# EAGLE board LUZES_18Fv2 (EAGLE 5.06)
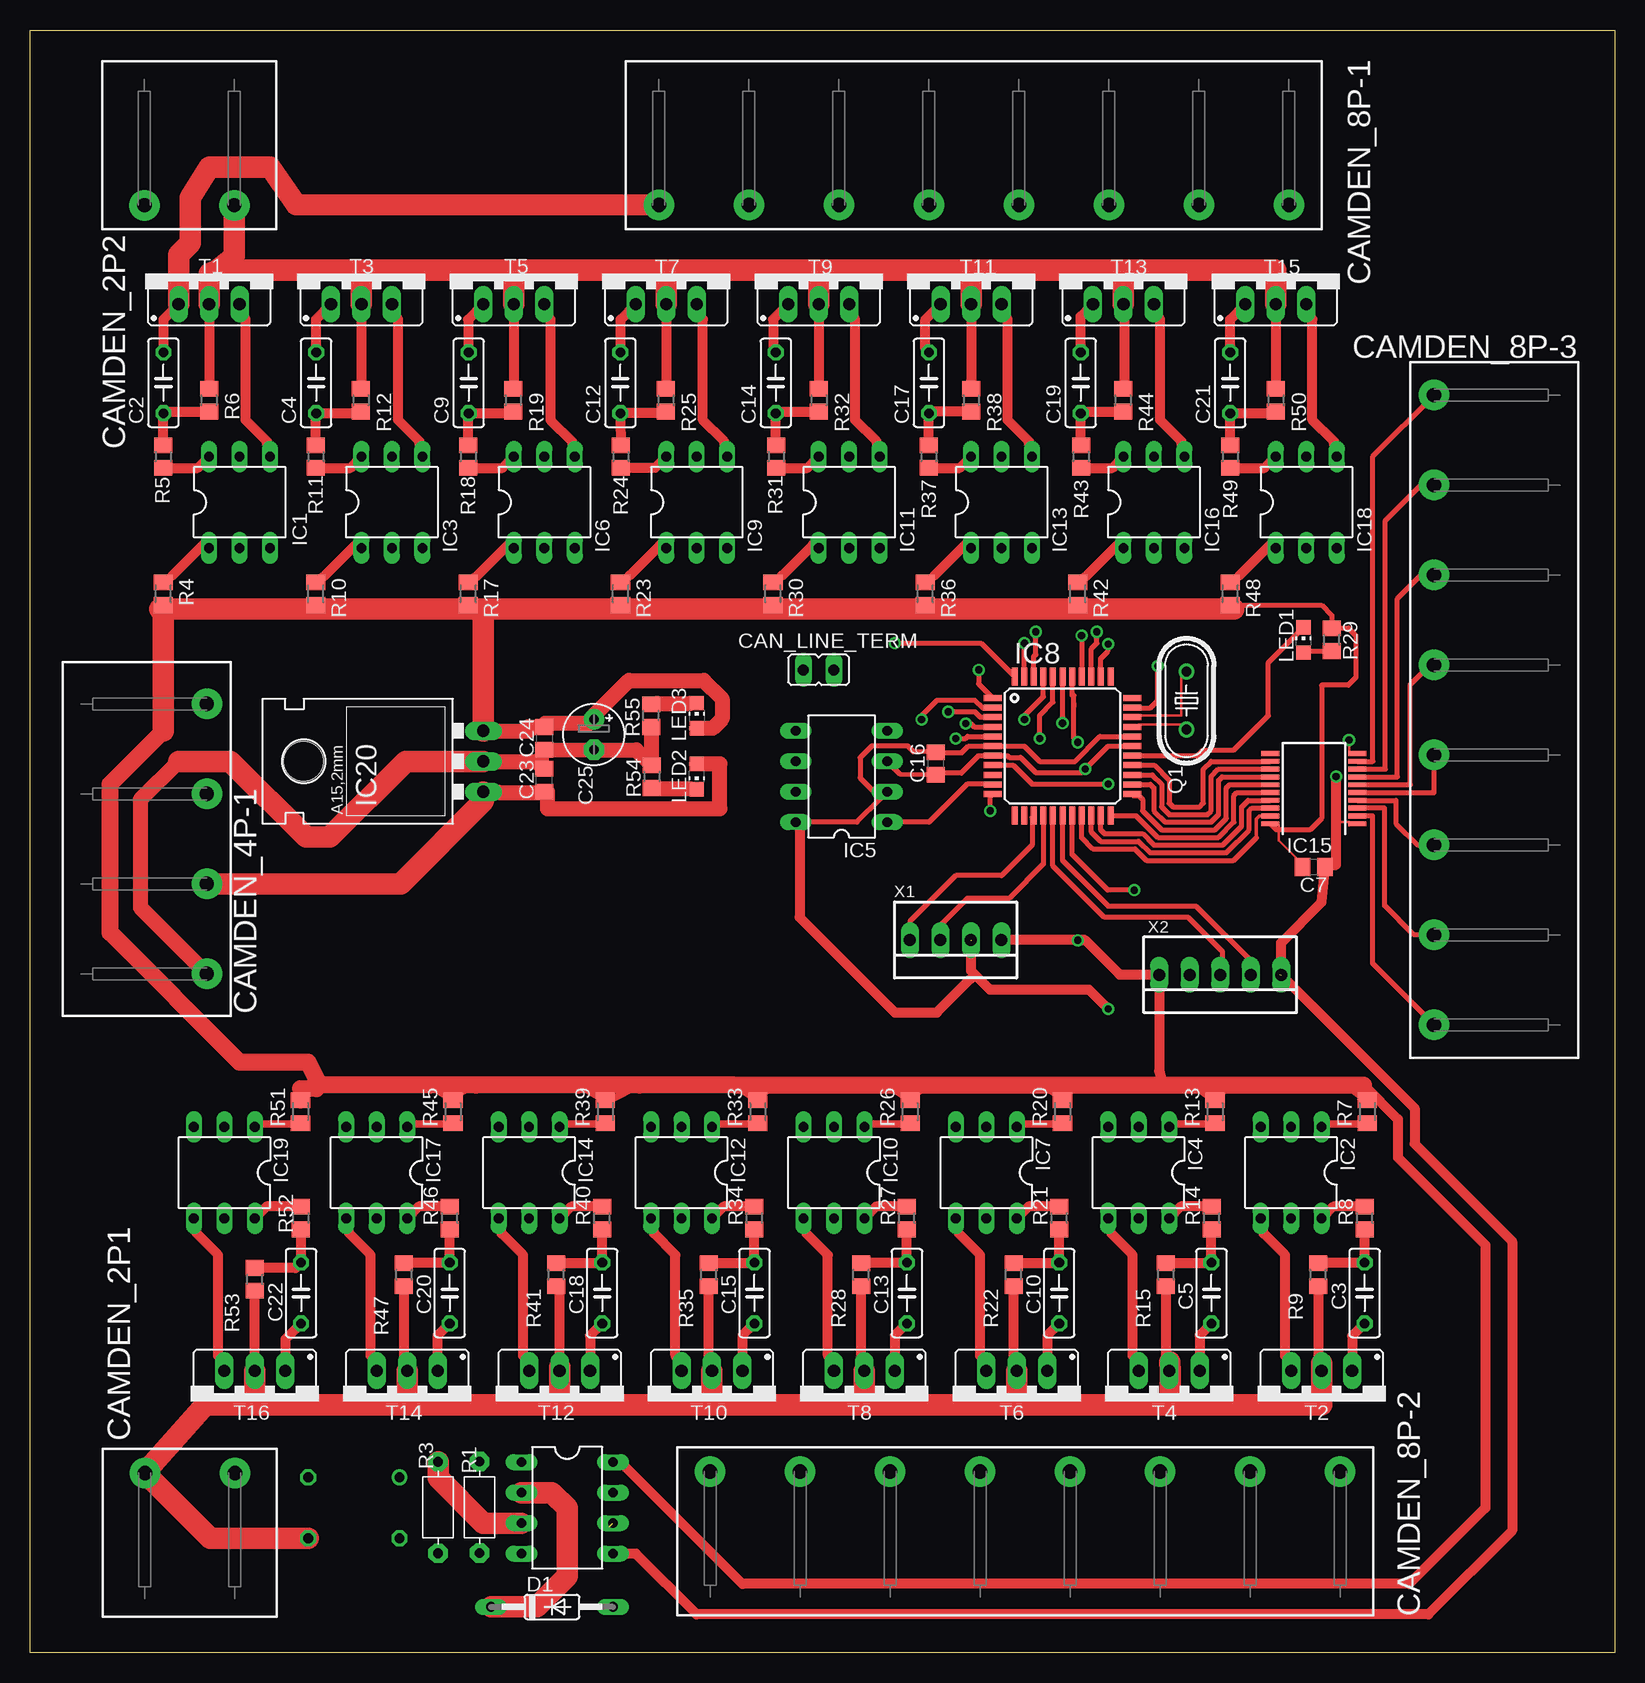
[diagram p0: board, top side]
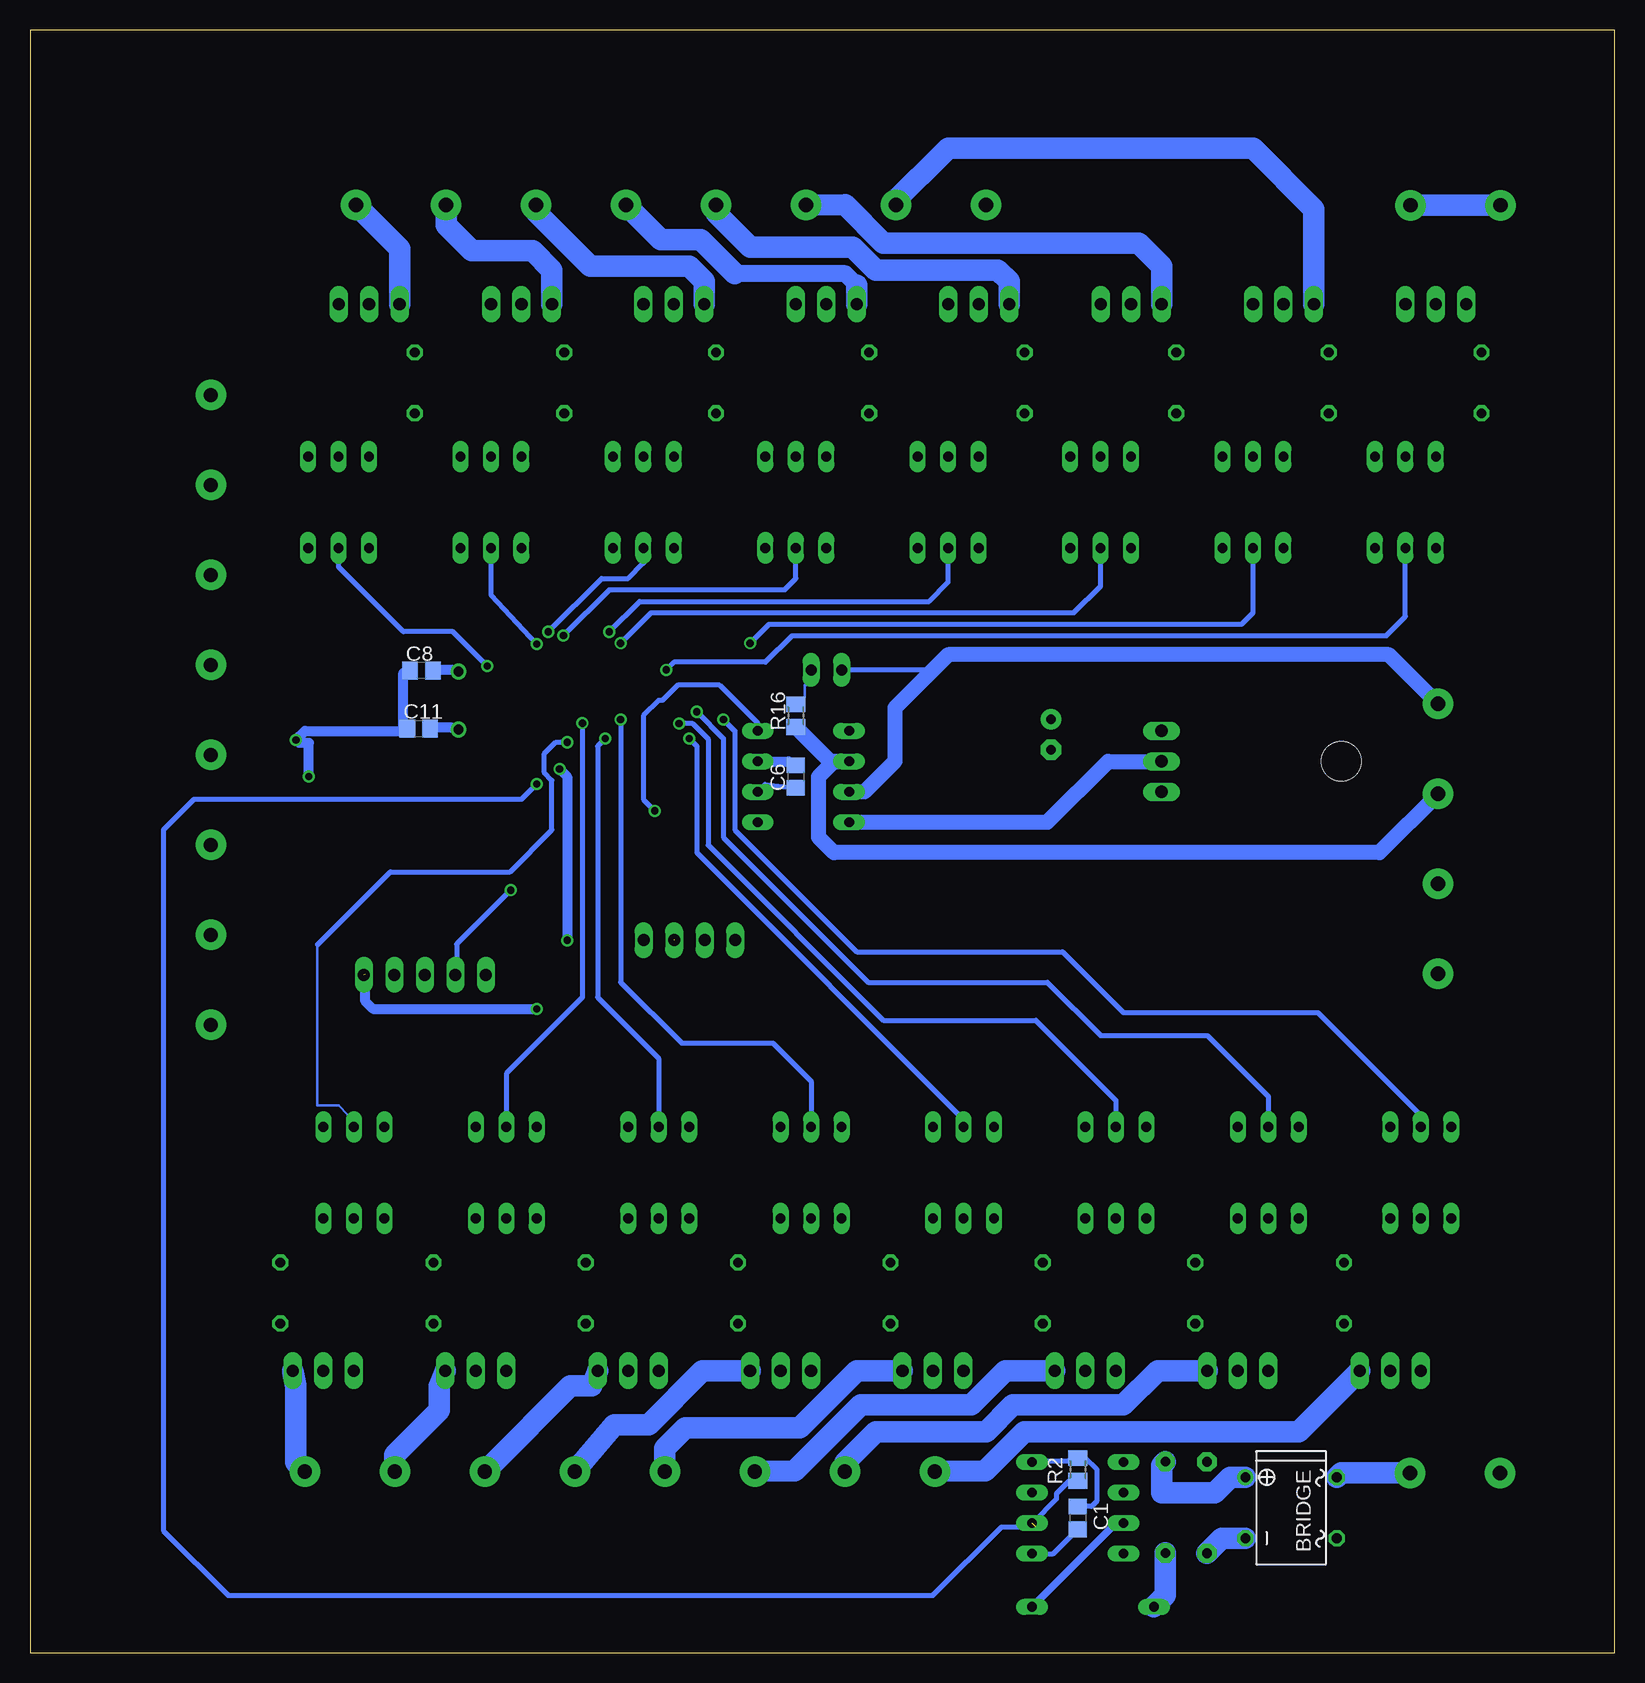
[diagram p1: board, bottom side, seen from below]

Size 132.08 x 135.25 mm. Coordinates in mm from the lower left corner, seen from the top.
Outline: 0,135.25 132.08,135.25 132.08,0 0,0 0,135.25
Copper layers (1*16): Top 0.035mm / dielectric 1.5mm / Bottom 0.035mm
Design rules "8mils": minimum track width 8mil, minimum drill 0.6mm, track to track 8mil, track to pad 8mil, pad to pad 8mil, via to via 8mil, smd to smd 8mil, copper to edge 40mil, drill to drill 10mil, minimum pad ring 10mil, minimum via ring 8mil, stop-mask expansion 0mil, vias tented up to drill 0mil, thermal gap 10mil

## Footprints (pad centres in the part's own frame; a part is rotated, then mirrored left to right if it is on the bottom)
DIL08 = drill 0.813 long: 1 -3.81,-3.81; 2 -1.27,-3.81; 3 1.27,-3.81; 4 3.81,-3.81; 5 3.81,3.81; 6 1.27,3.81; 7 -1.27,3.81; 8 -3.81,3.81
B-DIL = drill 0.813 round: + -2.54,-3.81 | drill 0.813 octagon: - 2.54,-3.81; AC1 2.54,3.81; AC2 -2.54,3.81
C0805 = smd 1.3 x 1.5: 1 -0.95,0; 2 0.95,0
C050-025X075 = drill 0.813 octagon: 1 -2.54,0; 2 2.54,0
E2,5-5 = drill 0.813 pad 1.7 round: + -1.27,0 | drill 0.813 pad 1.7 octagon: - 1.27,0
CTB9550-2 = drill 1.2 pad 2.54 round: P$1 0,0; P$2 7.5,0
CTB9550-4 = drill 1.2 pad 2.54 round: P$1 0,0; P$2 7.5,0; P$3 15,0; P$4 22.5,0
CTB9550-8 = drill 1.2 pad 2.54 round: P$9 0,0; P$10 7.5,0; P$11 15,0; P$12 22.5,0; P$13 30,0; P$14 37.5,0; P$15 45,0; P$16 52.5,0
JP1 = drill 0.914 long: 1 0,-1.27; 2 0,1.27
DO35-10 = drill 0.813 long: A 5.08,0; C -5.08,0
DIL06 = drill 0.813 long: 1 -2.54,-3.81; 2 0,-3.81; 3 2.54,-3.81; 4 2.54,3.81; 5 0,3.81; 6 -2.54,3.81
TQFP44 = smd 1.5 x 0.5: 1 -5.8,4; 2 -5.8,3.2; 3 -5.8,2.4; 4 -5.8,1.6; 5 -5.8,0.8; 6 -5.8,0; 7 -5.8,-0.8; 8 -5.8,-1.6; 9 -5.8,-2.4; 10 -5.8,-3.2; 11 -5.8,-4; 23 5.8,-4; 24 5.8,-3.2; 25 5.8,-2.4; 26 5.8,-1.6; 27 5.8,-0.8; 28 5.8,0; 29 5.8,0.8; 30 5.8,1.6; 31 5.8,2.4; 32 5.8,3.2; 33 5.8,4 | smd 0.5 x 1.5: 12 -4,-5.8; 13 -3.2,-5.8; 14 -2.4,-5.8; 15 -1.6,-5.8; 16 -0.8,-5.8; 17 0,-5.8; 18 0.8,-5.8; 19 1.6,-5.8; 20 2.4,-5.8; 21 3.2,-5.8; 22 4,-5.8; 34 4,5.8; 35 3.2,5.8; 36 2.4,5.8; 37 1.6,5.8; 38 0.8,5.8; 39 0,5.8; 40 -0.8,5.8; 41 -1.6,5.8; 42 -2.4,5.8; 43 -3.2,5.8; 44 -4,5.8
SSOP20 = smd 0.4 x 1.5: 1 -2.925,-3.625; 2 -2.275,-3.625; 3 -1.625,-3.625; 4 -0.975,-3.625; 5 -0.325,-3.625; 6 0.325,-3.625; 7 0.975,-3.625; 8 1.625,-3.625; 9 2.275,-3.625; 10 2.925,-3.625; 11 2.925,3.625; 12 2.275,3.625; 13 1.625,3.625; 14 0.975,3.625; 15 0.325,3.625; 16 -0.325,3.625; 17 -0.975,3.625; 18 -1.625,3.625; 19 -2.275,3.625; 20 -2.925,3.625
78XXL = drill 1.016 long: GND 0,-3.81; IN -2.54,-3.81; OUT 2.54,-3.81 | hole 3.302: 0,11.176
CHIP-LED0805 = smd 1.2 x 1.2: A 0,-1.05; C 0,1.05
HC49U-V = drill 0.813 round: 1 -2.413,0; 2 2.413,0
R-7,5 = drill 0.813 pad 1.6 octagon: 1 -3.81,0; 2 3.81,0
M0805 = smd 1.3 x 1.6: 1 -0.95,0; 2 0.95,0
R0805 = smd 1.3 x 1.5: 1 -0.95,0; 2 0.95,0
TO220DS = drill 1.016 long: A1 -2.54,-2.54; A2 0,-2.54; G 2.54,-2.54
22-23-2041 = drill 1 long: 1 -3.81,0; 2 -1.27,0; 3 1.27,0; 4 3.81,0
22-23-2051 = drill 1 long: 1 -5.08,0; 2 -2.54,0; 3 0,0; 4 2.54,0; 5 5.08,0

## Placement (x,y rotation side)
1  6N138  [DIL08]  44.77,12.06 270 top
BRIDGE  [B-DIL]  26.99,12.06 270 bottom
C1  100n  [C0805]  44.77,11.23 270 bottom
C2  0.05u  [C050-025X075]  11.12,105.84 90 top
C3  0.05u  [C050-025X075]  111.22,29.97 270 top
C4  0.05u  [C050-025X075]  23.85,105.84 90 top
C5  0.05u  [C050-025X075]  98.45,29.97 270 top
C6  100n  [C0805]  68.26,73.02 270 bottom
C7  100n  [C0805]  106.98,65.5 0 top
C8  22pF  [C0805]  99.46,81.85 180 bottom
C9  0.05u  [C050-025X075]  36.56,105.84 90 top
C10  0.05u  [C050-025X075]  85.77,29.97 270 top
C11  22pF  [C0805]  99.69,77.02 0 bottom
C12  0.05u  [C050-025X075]  49.2,105.84 90 top
C13  0.05u  [C050-025X075]  73.08,29.97 270 top
C14  0.05u  [C050-025X075]  62.15,105.84 90 top
C15  0.05u  [C050-025X075]  60.37,29.97 270 top
C16  100n  [C0805]  75.5,74.11 90 top
C17  0.05u  [C050-025X075]  74.92,105.84 90 top
C18  0.05u  [C050-025X075]  47.68,29.97 270 top
C19  0.05u  [C050-025X075]  87.56,105.84 90 top
C20  0.05u  [C050-025X075]  34.97,29.97 270 top
C21  0.05u  [C050-025X075]  100.02,105.84 90 top
C22  0.05u  [C050-025X075]  22.58,29.97 270 top
C23  100n  [C0805]  42.86,72.71 90 top
C24  100n  [C0805]  42.86,76.2 270 top
C25  47u  [E2,5-5]  46.99,76.52 270 top
CAMDEN_2P1  [CTB9550-2]  17.08,14.97 180 top
CAMDEN_2P2  [CTB9550-2]  9.53,120.65 0 top
CAMDEN_4P-1  [CTB9550-4]  14.73,56.58 90 top
CAMDEN_8P-1  [CTB9550-8]  52.4,120.66 0 top
CAMDEN_8P-2  [CTB9550-8]  109.18,15.1 180 top
CAMDEN_8P-3  [CTB9550-8]  117.01,104.82 270 top
CAN_LINE_TERM  [JP1]  65.72,81.92 270 top
D1  1N4148  [DO35-10]  43.5,3.81 0 top
IC1  MOC3022  [DIL06]  17.46,95.89 0 top
IC2  MOC3022  [DIL06]  105.09,40.01 180 top
IC3  MOC3022  [DIL06]  30.16,95.89 0 top
IC4  MOC3022  [DIL06]  92.39,40.01 180 top
IC5  MCP2551  [DIL08]  67.63,73.02 90 top
IC6  MOC3022  [DIL06]  42.86,95.89 0 top
IC7  MOC3022  [DIL06]  79.69,40.01 180 top
IC8  PIC18F4682  [TQFP44]  86.04,75.57 0 top
IC9  MOC3022  [DIL06]  55.56,95.89 0 top
IC10  MOC3022  [DIL06]  66.99,40.01 180 top
IC11  MOC3022  [DIL06]  68.26,95.89 0 top
IC12  MOC3022  [DIL06]  54.29,40.01 180 top
IC13  MOC3022  [DIL06]  80.96,95.89 0 top
IC14  MOC3022  [DIL06]  41.59,40.01 180 top
IC15  MAX6818  [SSOP20]  107,72.01 90 top
IC16  MOC3022  [DIL06]  93.66,95.89 0 top
IC17  MOC3022  [DIL06]  28.89,40.01 180 top
IC18  MOC3022  [DIL06]  106.36,95.89 0 top
IC19  MOC3022  [DIL06]  16.19,40.01 180 top
IC20  [78XXL]  33.97,74.3 90 top
LED1  [CHIP-LED0805]  106.11,84.41 0 top
LED2  [CHIP-LED0805]  55.56,73.02 180 top
LED3  [CHIP-LED0805]  55.56,78.11 0 top
Q1  10MHz  [HC49U-V]  96.37,79.35 90 top
R1  20K  [R-7,5]  37.47,12.11 270 top
R2  2K21  [M0805]  44.77,15.27 90 bottom
R3  20K  [R-7,5]  34.01,12.09 90 top
R4  330  [M0805]  11.11,88.27 270 top
R5  360  [R0805]  11.11,99.7 270 top
R6  470  [R0805]  14.92,104.39 270 top
R7  330  [M0805]  111.44,45.08 90 top
R8  360  [R0805]  111.22,36.23 90 top
R9  470  [R0805]  107.36,31.5 90 top
R10  330  [M0805]  23.81,88.27 270 top
R11  360  [R0805]  23.81,99.7 270 top
R12  470  [R0805]  27.58,104.39 270 top
R13  330  [M0805]  98.74,45.08 90 top
R14  360  [R0805]  98.47,36.23 90 top
R15  470  [R0805]  94.66,31.5 90 top
R16  120  [M0805]  68.26,78.11 90 bottom
R17  330  [M0805]  36.51,88.27 270 top
R18  360  [R0805]  36.51,99.7 270 top
R19  470  [R0805]  40.28,104.39 270 top
R20  330  [M0805]  86.04,45.08 90 top
R21  360  [R0805]  85.77,36.23 90 top
R22  470  [R0805]  81.96,31.5 90 top
R23  330  [M0805]  49.21,88.27 270 top
R24  360  [R0805]  49.24,99.7 270 top
R25  470  [R0805]  52.98,104.39 270 top
R26  330  [M0805]  73.34,45.08 90 top
R27  360  [R0805]  73.07,36.23 90 top
R28  470  [R0805]  69.26,31.5 90 top
R29  560  [R0805]  108.49,84.43 90 top
R30  330  [M0805]  61.91,88.27 270 top
R31  360  [R0805]  62.19,99.7 270 top
R32  470  [R0805]  65.75,104.39 270 top
R33  330  [M0805]  60.64,45.08 90 top
R34  360  [R0805]  60.37,36.23 90 top
R35  470  [R0805]  56.56,31.5 90 top
R36  330  [M0805]  74.61,88.27 270 top
R37  360  [R0805]  74.89,99.7 270 top
R38  470  [R0805]  78.45,104.39 270 top
R39  330  [M0805]  47.94,45.08 90 top
R40  360  [R0805]  47.67,36.23 90 top
R41  470  [R0805]  43.86,31.5 90 top
R42  330  [M0805]  87.31,88.27 270 top
R43  360  [R0805]  87.59,99.7 270 top
R44  470  [R0805]  91.08,104.39 270 top
R45  330  [M0805]  35.24,45.08 90 top
R46  360  [R0805]  34.97,36.23 90 top
R47  470  [R0805]  31.16,31.5 90 top
R48  330  [M0805]  100.01,88.27 270 top
R49  360  [R0805]  100.01,99.7 270 top
R50  470  [R0805]  103.82,104.39 270 top
R51  330  [M0805]  22.54,45.08 90 top
R52  360  [R0805]  22.58,36.23 90 top
R53  470  [R0805]  18.73,31.11 90 top
R54  560  [R0805]  51.81,73.02 270 top
R55  560  [R0805]  51.75,78.11 90 top
T1  BTA216  [TO220DS]  14.92,114.93 0 top
T2  BTA216  [TO220DS]  107.63,20.95 180 top
T3  BTA216  [TO220DS]  27.62,114.93 0 top
T4  BTA216  [TO220DS]  94.93,20.95 180 top
T5  BTA216  [TO220DS]  40.32,114.93 0 top
T6  BTA216  [TO220DS]  82.23,20.95 180 top
T7  BTA216  [TO220DS]  53.02,114.93 0 top
T8  BTA216  [TO220DS]  69.53,20.95 180 top
T9  BTA216  [TO220DS]  65.72,114.93 0 top
T10  BTA216  [TO220DS]  56.83,20.95 180 top
T11  BTA216  [TO220DS]  78.42,114.93 0 top
T12  BTA216  [TO220DS]  44.13,20.95 180 top
T13  BTA216  [TO220DS]  91.12,114.93 0 top
T14  BTA216  [TO220DS]  31.43,20.95 180 top
T15  BTA216  [TO220DS]  103.82,114.93 0 top
T16  BTA216  [TO220DS]  18.73,20.95 180 top
X1  22-23-2041  [22-23-2041]  77.14,59.4 180 top
X2  22-23-2051  [22-23-2051]  99.17,56.5 180 top

## Library data of the parts
1 = optocoupler
BRIDGE = rectifier
C1-C25 R2 R4-R55 = rcl
CAMDEN_2P1 CAMDEN_2P2 CAMDEN_4P-1 CAMDEN_8P-1-CAMDEN_8P-3 = mycomponents
CAN_LINE_TERM = jumper
D1 = diode
IC1-IC4 IC6 IC7 IC9-IC14 IC16-IC19 = ic-package
IC5 = micro-philips
IC8 = microchip
IC15 = maxim
IC20 = v-reg
LED1-LED3 = led
Q1 = crystal
R1 R3 = discrete
T1-T16 = triac
X1 X2 = con-molex

## Nets
+5V: 1.8 C1.1 C6.1 C7.1 C16.1 C24.1 C25.+ IC5.3 IC8.7 IC8.28 IC15.20 IC20.OUT LED3.A R2.2 R4.2 R7.2 R10.2 R13.2 R17.2 R20.2 R23.2 R26.2 R29.2 R30.2 R33.2 R36.2 R39.2 R42.2 R45.2 R48.2 R51.2 X1.1 X2.5
+18V: 1.6 IC8.8 R2.1
CAN_H: CAMDEN_4P-1.P$4 CAN_LINE_TERM.1 IC5.7
CAN_L: CAMDEN_4P-1.P$3 IC5.6 R16.1
CAN_RX(TTL): IC5.4 IC8.11
CAN_TX(TTL): IC5.1 IC8.10
GND: 1.5 C1.2 C6.2 C7.2 C8.2 C11.1 C16.2 C23.2 C24.2 C25.- CAMDEN_4P-1.P$1 IC5.2 IC5.8 IC8.6 IC8.29 IC15.1 IC15.10 IC20.GND R54.1 R55.1 X1.2 X2.1
INPUT1: IC8.19 IC15.19
INPUT2: IC8.20 IC15.18
INPUT3: IC8.21 IC15.17
INPUT4: IC8.22 IC15.16
INPUT5: IC8.23 IC15.15
INPUT6: IC8.24 IC15.14
INPUT7: IC8.25 IC15.13
INPUT8: IC8.26 IC15.12
MCLR: IC8.18 X2.4
N$1: C8.1 IC8.31 Q1.2
N$2: C11.2 IC8.30 Q1.1
N$3: BRIDGE.AC1 CAMDEN_2P1.P$2 R9.1 R15.1 R22.1 R28.1 R35.1 R41.1 R47.1 R53.1 T2.A2 T4.A2 T6.A2 T8.A2 T10.A2 T12.A2 T14.A2 T16.A2
N$4: BRIDGE.AC2 CAMDEN_2P1.P$1
N$5: BRIDGE.+ R1.1
N$6: CAMDEN_8P-3.P$16 IC15.2
N$7: CAMDEN_8P-3.P$15 IC15.3
N$8: CAMDEN_8P-3.P$9 IC15.9
N$9: CAMDEN_8P-3.P$10 IC15.8
N$10: CAMDEN_8P-3.P$11 IC15.7
N$11: CAMDEN_8P-3.P$14 IC15.4
N$12: CAMDEN_8P-3.P$13 IC15.5
N$13: CAMDEN_8P-3.P$12 IC15.6
N$16: IC3.6 R11.2
N$17: IC6.6 R18.2
N$18: IC9.6 R24.2
N$20: IC2.6 R8.2
N$25: IC4.6 R14.2
N$27: IC11.6 R31.2
N$29: IC13.6 R37.2
N$30: IC16.6 R43.2
N$33: IC17.6 R46.2
N$34: IC14.6 R40.2
N$35: IC12.6 R34.2
N$36: IC10.6 R27.2
N$37: IC7.6 R21.2
N$38: LED1.A R29.1
N$39: IC8.27 LED1.C
N$40: IC18.6 R49.2
N$41: IC19.6 R52.2
N$46: CAMDEN_2P2.P$1 CAMDEN_2P2.P$2 R6.1 R12.1 R19.1 R25.1 R32.1 R38.1 R44.1 R50.1 T1.A2 T3.A2 T5.A2 T7.A2 T9.A2 T11.A2 T13.A2 T15.A2
N$111: C23.1 CAMDEN_4P-1.P$2 IC20.IN LED2.A
N$112: LED2.C R54.2
N$115: LED3.C R55.2
N$116: 1.2 D1.C R1.2
N$117: BRIDGE.- R3.1
N$118: 1.3 D1.A R3.2
N$119: IC1.1 R4.1
N$120: IC1.6 R5.2
N$121: C2.1 R5.1 R6.2
N$123: IC1.4 T1.G
N$125: IC3.1 R10.1
N$127: C4.1 R11.1 R12.2
N$129: IC3.4 T3.G
N$131: IC6.1 R17.1
N$133: C9.1 R18.1 R19.2
N$135: IC6.4 T5.G
N$137: IC9.1 R23.1
N$139: C12.1 R24.1 R25.2
N$141: IC9.4 T7.G
N$143: IC11.1 R30.1
N$145: C14.1 R31.1 R32.2
N$147: IC11.4 T9.G
N$149: IC13.1 R36.1
N$151: C17.1 R37.1 R38.2
N$153: IC13.4 T11.G
N$155: IC16.1 R42.1
N$157: C19.1 R43.1 R44.2
N$159: IC16.4 T13.G
N$161: IC18.1 R48.1
N$163: C21.1 R49.1 R50.2
N$165: IC18.4 T15.G
N$168: IC2.1 R7.1
N$170: C3.1 R8.1 R9.2
N$172: IC2.4 T2.G
N$174: IC4.1 R13.1
N$176: C5.1 R14.1 R15.2
N$178: IC4.4 T4.G
N$180: IC7.1 R20.1
N$182: C10.1 R21.1 R22.2
N$184: IC7.4 T6.G
N$186: IC10.1 R26.1
N$188: C13.1 R27.1 R28.2
N$190: IC10.4 T8.G
N$192: IC12.1 R33.1
N$194: C15.1 R34.1 R35.2
N$196: IC12.4 T10.G
N$198: IC14.1 R39.1
N$200: C18.1 R40.1 R41.2
N$202: IC14.4 T12.G
N$204: IC17.1 R45.1
N$206: C20.1 R46.1 R47.2
N$208: IC17.4 T14.G
N$210: IC19.1 R51.1
N$212: C22.1 R52.1 R53.2
N$214: IC19.4 T16.G
N$217: CAN_LINE_TERM.2 R16.2
OUT1: IC8.32 IC18.2
OUT2: IC8.35 IC16.2
OUT3: IC8.36 IC13.2
OUT4: IC8.37 IC11.2
OUT5: IC8.42 IC9.2
OUT6: IC6.2 IC8.43
OUT7: IC3.2 IC8.44
OUT8: IC1.2 IC8.1
OUT9: IC2.2 IC8.38
OUT10: IC4.2 IC8.39
OUT11: IC7.2 IC8.40
OUT12: IC8.41 IC10.2
OUT13: IC8.5 IC12.2
OUT14: IC8.4 IC14.2
OUT15: IC8.3 IC17.2
OUT16: IC8.2 IC19.2
OUTPUT1: C22.2 CAMDEN_8P-2.P$16 T16.A1
OUTPUT2: C20.2 CAMDEN_8P-2.P$15 T14.A1
OUTPUT3: C18.2 CAMDEN_8P-2.P$14 T12.A1
OUTPUT4: C15.2 CAMDEN_8P-2.P$13 T10.A1
OUTPUT5: C13.2 CAMDEN_8P-2.P$12 T8.A1
OUTPUT6: C10.2 CAMDEN_8P-2.P$11 T6.A1
OUTPUT7: C5.2 CAMDEN_8P-2.P$10 T4.A1
OUTPUT8: C3.2 CAMDEN_8P-2.P$9 T2.A1
OUTPUT9: C2.2 CAMDEN_8P-1.P$9 T1.A1
OUTPUT10: C4.2 CAMDEN_8P-1.P$10 T3.A1
OUTPUT11: C9.2 CAMDEN_8P-1.P$11 T5.A1
OUTPUT12: C12.2 CAMDEN_8P-1.P$12 T7.A1
OUTPUT13: C14.2 CAMDEN_8P-1.P$13 T9.A1
OUTPUT14: C17.2 CAMDEN_8P-1.P$14 T11.A1
OUTPUT15: C19.2 CAMDEN_8P-1.P$15 T13.A1
OUTPUT16: C21.2 CAMDEN_8P-1.P$16 T15.A1
PGC: IC8.16 X2.3
PGD: IC8.17 X2.2
RS232_RX: IC8.14 X1.4
RS232_TX: IC8.15 X1.3

## Tracks (layer width: path | path; a pad name or v marks a point on that pad's centre or on a via)
+5V  (via drill 0.6)
  Top 0.203: 89.71,86.85 88.07,87.76 R42.2 | 98.4,87.32 98.91,87.34 R48.2 99.5,86.74 | C7.1 106.11,65.66 104.08,67.69 104.08,68.96 IC15.20 | R7.2 110.68,46.1 | 73.3,87.28 73.85,87.76 R36.2
  Top 0.406: X2.5 | R48.2 107.63,87.31 108.49,86.46 R29.2 108.51,85.41 109.85,85.41 110.49,84.77 110.49,81.28 109.85,80.64 107.63,80.64 107.63,69.53 106.68,68.58 103.88,68.58 IC15.20 | IC8.28 89.85,75.57 v87.95,73.66 87.63,73.34 83.82,73.34 82.55,74.61 81.6,74.61 81.45,74.77 IC8.7 79.08,74.77 77.62,73.31 75.96,73.31 C16.1 72.53,73.2 IC5.3 | R10.2 R4.2 11.11,86.99 | R17.2 R23.2 R30.2 R36.2 | 46.67,77.47 C25.+ 46.99,78.11 | 49.09,16 48.7,16 1.8
  Top 0.61: 24.13,47.31 23.88,47.01 | 33.34,47.31 R45.2 35.24,46.36 37.15,47.31 | 45.72,47.31 R39.2 48.26,46.04 50.8,47.31 | 58.73,47.31 R33.2 60.64,46.36 62.55,47.62 71.12,47.62 R26.2 73.34,46.36 75.57,47.62 84.13,47.62 R20.2 86.04,46.36 87.95,47.62 94.3,47.62 96.52,47.62 R13.2 98.74,46.36 100.65,47.62 109.22,47.62 R7.2 | 41.59,76.83 41.51,77.16
  Top 0.813: X2.5 94.09,48.46 94.3,47.62 | 87.92,59.4 X1.1 | 87.92,59.4 90.81,56.52 X2.5 | R23.2 49.85,87.32 49.85,86.99 | 89.71,86.85 88.15,86.85 88.26,86.99 | 100.33,86.99 99.5,86.99 99.5,86.74 | 87.92,59.4 87.31,59.4 v87.31,59.37 | 49.09,16 59.37,5.72 114.93,5.72 121.28,12.06 121.28,33.97 113.98,41.27 113.98,44.45 111.12,47.31
  Top 1.27: 41.51,77.16 C24.1 42.91,77.47 43.72,77.47 46.67,77.47 | IC20.OUT 41.59,76.83 | 46.99,78.11 49.91,81.03 56.15,81.03 57.67,79.51 57.67,77.83 56.88,77.04 55.58,77.04 LED3.A
  Top 1.422: R51.2 22.54,46.99 23.88,47.01 | 11.11,76.83 6.67,72.39 6.67,60.01 17.46,49.21 23.18,49.21 24.13,47.31 33.34,47.31 37.15,47.31 45.72,47.31 50.8,47.31 58.73,47.31 111.12,47.31
  Top 1.778: 11.11,86.99 37.6,86.99 | 37.6,86.99 49.85,86.99 88.26,86.99 100.33,86.99 | 11.11,86.99 10.79,86.99 | 11.11,76.83 11.11,86.99 | IC20.OUT 37.78,86.81 37.6,86.99
  Bottom 0.203: 45.53,16 R2.2
  Bottom 0.406: 45.53,16 48.45,16 1.8 | C1.1 43.61,12.18 43.19,12.59 43.19,15.3 44.13,16.24 44.75,16.24 R2.2
  Bottom 0.813: IC5.3 68.88,74.3 C6.1 | v87.31,59.37 87.31,73.02 v87.95,73.66
+18V  (via drill 0.6)  (1 unrouted)
  Top 0.406: IC8.8 81.93,73.96 83.5,72.39 v89.85,72.39
  Bottom 0.406: 47.94,10.8 1.6 46.53,12.85 46.53,13.26 45.47,14.32 R2.1 | 48.26,10.48 51.12,10.48 56.83,4.76 115.57,4.76 120.97,10.16 120.97,68.58 118.43,71.12 91.12,71.12 v89.85,72.39
CAN_H
  Bottom 0.406: CAN_LINE_TERM.1 57.15,81.92 56.99,81.76
  Bottom 1.27: IC5.7 62.55,71.76 60.01,74.3 60.01,78.74 56.99,81.76 55.56,83.18 18.84,83.18 CAMDEN_4P-1.P$4
CAN_L
  Bottom 1.27: R16.1 65.4,74.3 IC5.6 65.09,74.3 66.36,73.02 66.36,67.95 65.09,66.67 19.64,66.67 CAMDEN_4P-1.P$3
CAN_RX(TTL)  (via drill 0.6)
  Top 0.406: v80.01,70.17 80.01,71.33 IC8.11
  Bottom 0.406: IC5.4 71.44,77.47 74.61,80.64 78.1,80.64 79.37,79.37 79.69,79.37 80.96,78.11 80.96,71.12 v80.01,70.17
CAN_TX(TTL)
  Top 0.406: IC5.1 74.93,69.21 78.1,72.39 80.22,72.39 IC8.10
GND  (via drill 0.6)  (2 unrouted)
  Top 0.203: C7.2 107.89,65.66 | 109.92,68.96 IC15.1 109.92,69.21 108.84,69.21 | v109.92,76.07 109.92,75.06 IC15.10
  Top 0.406: 70.89,71.2 68.9,69.21 IC5.8 64.13,68.9 | 70.89,71.2 IC5.2 | 78.41,56.18 X1.2 | IC8.29 89.15,76.36 87.08,74.3 84.14,74.3 82.87,75.57 IC8.6 78.19,75.57 77.62,74.99 75.96,74.99 C16.2 73.6,75.11 73.13,75.57 70.16,75.57 69.18,74.6 69.18,72.91 70.89,71.2 | 46.72,75.27 C25.- | 51.81,77.1 R55.1
  Top 0.813: v108.84,73.02 108.84,69.21 108.84,65.66 107.89,65.66 | C24.2 C23.2 | C7.2 107.63,62.55 104.25,59.17 X2.1 115.39,45.37 115.39,42.41 123.51,34.29 123.51,10.16 116.52,3.17 55.56,3.17 50.48,8.25 1.5 | 78.41,56.18 75.57,53.34 72.07,53.34 64.13,61.28 64.13,68.9 | 78.42,59.37 78.42,56.83 80.01,55.24 88.26,55.24 v89.85,53.66
  Top 1.27: 12.38,74.3 9.21,71.12 9.21,62.11 CAMDEN_4P-1.P$1 | C23.2 42.23,74.3 IC20.GND | C24.2 46.72,75.27 | C25.- 50.53,75.25 R54.1 51.81,77.1
  Top 1.778: IC20.GND 31.3,74.3 24.98,67.98 23.01,67.98 16.7,74.29 12.39,74.29 12.38,74.3
  Bottom 0.203: 100.52,81.66 C8.2 | 100.77,76.83 C11.1 | 109.66,75.82 v109.92,76.07
  Bottom 0.406: C6.2 70.82,72.37 IC5.2 | 1.5 46.79,8.25 C1.2
  Bottom 0.813: 100.96,76.83 100.77,76.83 | v109.92,76.07 109.16,76.83 100.96,76.83 | v108.84,73.02 108.84,75.82 109.66,75.82 | v89.85,53.66 103.51,53.66 104.14,54.29 104.14,56.52 | 100.52,81.66 100.96,81.66 100.96,76.83
  Bottom 1.27: IC5.8 47.31,69.21 42.23,74.3 IC20.GND
INPUT1
  Top 0.305: IC15.19 102.44,69.74 102.2,69.5 102.2,67.91
  Top 0.406: IC8.19 87.64,67.93 88.58,66.99 92.07,66.99 93.03,66.04 100.33,66.04 102.2,67.91
INPUT2
  Top 0.406: IC15.18 101.82,70.39 101.6,70.17 101.6,68.58 99.7,66.67 93.34,66.67 92.39,67.63 89.22,67.63 88.44,68.4 IC8.20
INPUT3
  Top 0.406: IC8.21 89.24,68.55 89.54,68.26 92.71,68.26 93.66,67.31 99.38,67.31 100.96,68.9 100.96,70.48 101.52,71.04 IC15.17
INPUT4
  Top 0.406: IC8.22 92.16,69.77 93.98,67.95 99.06,67.95 100.33,69.21 100.33,71.44 100.58,71.69 IC15.16
INPUT5
  Top 0.406: IC15.15 99.96,72.34 99.7,72.07 99.7,69.53 98.74,68.58 94.3,68.58 92.71,70.17 92.71,71.12 92.39,71.44 91.97,71.44 IC8.23
INPUT6
  Top 0.406: IC8.24 93.37,72.36 93.66,72.07 93.66,70.17 94.62,69.21 98.43,69.21 99.06,69.85 99.06,72.71 99.34,72.99 IC15.14
INPUT7
  Top 0.406: IC8.25 93.52,73.17 94.3,72.39 94.3,70.48 94.93,69.85 98.11,69.85 98.43,70.17 98.43,73.02 99.04,73.64 IC15.13
INPUT8
  Top 0.406: IC8.26 93.68,73.96 94.93,72.71 94.93,70.8 95.25,70.48 97.47,70.48 97.79,70.8 97.79,73.66 98.43,74.3 98.43,74.29 IC15.12
MCLR  (via drill 0.6)
  Top 0.406: IC8.18 86.84,66.51 89.8,63.55 v92.01,63.55
  Bottom 0.406: X2.4 96.52,56.62 96.52,59.05 92.39,63.18 92.38,63.18 v92.01,63.55
N$1
  Top 0.203: IC8.31 92.39,78.11 95.95,78.11 95.95,81.41 Q1.2
  Bottom 0.203: 98.49,81.92 C8.1
  Bottom 0.813: 98.49,81.92 96.96,81.92 Q1.2
N$2
  Top 0.203: IC8.30 92.39,77.34 95.95,77.34 Q1.1
  Bottom 0.203: 98.74,77.09 C11.2
  Bottom 0.813: 98.74,77.09 96.96,77.09 Q1.1
N$3
  Top 0.203: 107.38,30.1 R9.1 | 107.38,24.77 T2.A2 | 94.68,30.1 R15.1 | T4.A2 94.68,24.77 | 81.98,30.1 R22.1 | 69.28,30.1 R28.1 | 56.58,30.1 R35.1 | 31.18,30.1 R47.1
  Top 0.406: 107.38,24.77 107.38,23.43 107.63,23.18 | 95.03,23.5 T4.A2 | 94.68,24.77 94.68,22.16 94.93,21.91 | 44.13,30.28 R41.1 | T12.A2 44.13,21.27 44.45,20.64 | T10.A2 56.58,23.75
  Top 0.813: T16.A2 R53.1 | 107.38,24.77 107.38,30.1 | 94.68,24.77 94.68,30.1 | 81.98,30.1 81.98,24.77 T6.A2 | 69.28,30.1 69.28,24.77 T8.A2 | 56.58,30.1 56.58,24.77 56.58,23.75 | 31.18,30.1 31.18,24.77 T14.A2 | 44.13,23.81 44.13,30.28
  Top 1.778: 18.73,20.64 31.43,20.64 | 31.43,20.64 44.13,20.64 | 44.13,20.64 44.45,20.64 56.83,20.64 | 56.83,20.64 69.53,20.64 | 69.53,20.64 82.31,20.64 | 82.31,20.64 95.03,20.64 | 95.03,20.64 107.63,20.64 107.63,23.18 107.63,24.13 | 95.03,20.64 95.03,23.5 95,24.24 | 69.53,20.64 T8.A2 | 44.13,20.64 T12.A2 44.13,23.81 | 31.43,20.64 T14.A2 | 18.73,20.64 T16.A2 | 18.73,20.64 14.62,20.64 CAMDEN_2P1.P$2 15.02,9.53 BRIDGE.AC1 | T10.A2 56.83,20.64 | T6.A2 82.23,20.72 82.31,20.64
N$4
  Bottom 1.778: CAMDEN_2P1.P$1 22.82,14.97 BRIDGE.AC2
N$5
  Bottom 1.778: BRIDGE.+ 32.07,14.61 33.34,13.33 37.78,13.33 37.78,15.6 R1.1
N$6
  Top 0.406: IC15.2 111.88,69.74 111.88,57.46 CAMDEN_8P-3.P$16
N$7
  Top 0.406: IC15.3 112.88,70.39 112.88,62.27 115.33,59.82 CAMDEN_8P-3.P$15
N$8
  Top 0.406: IC15.9 111.91,74.29 111.91,99.72 CAMDEN_8P-3.P$9
N$9
  Top 0.406: IC15.8 112.94,73.64 112.94,94.37 115.89,97.32 CAMDEN_8P-3.P$10
N$10
  Top 0.406: IC15.7 113.95,72.99 113.95,87.85 115.92,89.82 CAMDEN_8P-3.P$11
N$11
  Top 0.406: IC15.4 113.83,71.04 113.83,69.12 115.63,67.32 CAMDEN_8P-3.P$14
N$12
  Top 0.406: IC15.5 117.01,71.69 CAMDEN_8P-3.P$13
N$13
  Top 0.406: IC15.6 115.03,72.34 115.03,80.7 116.65,82.32 CAMDEN_8P-3.P$12
N$16
  Top 0.813: IC3.6 26.67,98.74 R11.2
N$17
  Top 0.813: IC6.6 39.37,98.74 R18.2
N$18
  Top 0.813: IC9.6 52.07,98.74 R24.2
N$20
  Top 0.813: R8.2 108.61,37.17 IC2.6
N$25
  Top 0.813: R14.2 95.91,37.17 IC4.6
N$27
  Top 0.813: IC11.6 64.77,98.74 R31.2
N$29
  Top 0.813: IC13.6 77.47,98.74 R37.2
N$30
  Top 0.813: IC16.6 90.17,98.74 R43.2
N$33
  Top 0.813: R46.2 32.41,37.17 IC17.6
N$34
  Top 0.813: R40.2 45.11,37.17 IC14.6
N$35
  Top 0.813: R34.2 57.81,37.17 IC12.6
N$36
  Top 0.813: R27.2 70.51,37.17 IC10.6
N$37
  Top 0.813: R21.2 83.21,37.17 IC7.6
N$38
  Top 0.406: R29.1 106.23,83.48 LED1.A
N$39
  Top 0.406: IC8.27 97.31,74.77 97.79,75.25 100.33,75.25 103.19,78.11 103.19,82.54 LED1.C
N$40
  Top 0.813: IC18.6 102.87,98.74 R49.2
N$41
  Top 0.813: R52.2 19.71,37.17 IC19.6
N$46
  Top 0.203: 78.43,105.98 R38.1 | 91.19,105.79 R44.1 | 65.73,105.73 R32.1 | 53.03,105.85 R25.1 | 27.62,105.55 R12.1 | 40.32,105.43 R19.1
  Top 0.406: T7.A2 53.03,111.95
  Top 0.813: T1.A2 R6.1 | 78.43,105.98 78.43,111.31 T11.A2 | T15.A2 R50.1 | 91.19,105.79 91.19,111.12 T13.A2 | 65.73,105.73 65.73,111.06 T9.A2 | T3.A2 27.62,105.55 | T5.A2 40.32,105.43 | 53.03,111.95 53.03,105.85
  Top 1.778: 27.62,115.25 15.56,115.25 | 15.56,115.25 14.92,114.93 T1.A2 | 40.32,115.25 27.62,115.25 | 40.32,115.25 52.87,115.25 | 52.87,115.25 65.72,115.25 | 65.72,115.25 78.42,115.25 | 78.42,115.25 91.12,115.25 | 91.12,115.25 103.82,115.25 T15.A2 | 27.62,115.25 T3.A2 | T5.A2 40.32,115.25 | 78.42,115.25 T11.A2 | 65.72,115.25 T9.A2 | CAMDEN_2P2.P$2 17.02,116.4 15.56,115.25 | T7.A2 53.02,115.1 52.87,115.25 | 91.12,115.25 T13.A2
  Bottom 1.778: CAMDEN_2P2.P$2 CAMDEN_2P2.P$1
N$111
  Top 0.203: C23.1 43.12,71.76
  Top 1.27: C23.1 42.61,71.7 39.05,71.7 IC20.IN | 43.12,71.76 43.12,70.34 57.5,70.34 57.5,74.08 LED2.A
  Top 1.778: IC20.IN 37.78,70.98 30.88,64.08 CAMDEN_4P-1.P$2
N$112
  Top 0.203: 55.05,72.01 LED2.C | R54.2 52.51,72.01
  Top 1.27: 52.51,72.01 55.05,72.01
N$115
  Top 0.203: 55.05,79.12 LED3.C | R55.2 52.26,79.12
  Top 1.27: 52.26,79.12 55.05,79.12
N$116
  Top 1.778: 1.2 43.5,13.33 44.77,12.06 44.77,6.35 42.23,3.81 D1.C
  Bottom 1.778: R1.2 37.47,4.76 D1.C
N$117
  Bottom 1.778: BRIDGE.- 32.76,9.53 R3.1
N$118
  Top 1.778: R3.2 34.01,14.57 37.78,10.8 1.3
  Bottom 0.61: 1.3 41.59,10.8 D1.A
N$119
  Top 0.203: R4.1 11.87,89.79
  Top 0.813: 11.87,89.79 14.41,92.33 IC1.1
N$120
  Top 0.813: IC1.6 13.97,98.74 R5.2
N$121
  Top 0.61: R5.1 | C2.1 11.15,103.42
  Top 0.813: R5.1 C2.1 | 11.15,103.42 R6.2
N$123
  Top 0.813: IC1.4 19.75,100.96 17.97,102.74 17.97,111.12 T1.G
N$125
  Top 0.813: R10.1 24.57,89.79 27.11,92.33 IC3.1
N$127
  Top 0.813: R12.2 27.12,103.3 C4.1 23.81,103.27 R11.1
N$129
  Top 0.813: IC3.4 32.45,100.96 30.67,102.74 30.67,111.12 T3.G
N$131
  Top 0.813: R17.1 37.27,89.79 39.81,92.33 IC6.1
N$133
  Top 0.813: R19.2 39.82,103.3 C9.1 36.51,103.26 R18.1
N$135
  Top 0.813: IC6.4 45.15,100.96 43.37,102.74 43.37,111.12 T5.G
N$137
  Top 0.203: R23.1 49.97,89.79
  Top 0.813: 49.97,89.79 52.51,92.33 IC9.1
N$139
  Top 0.813: R25.2 53.16,103.3 C12.1 49.17,102.95 R24.1
N$141
  Top 0.813: IC9.4 57.85,100.96 56.07,102.74 56.07,111.12 T7.G
N$143
  Top 0.203: 62.67,89.79 R30.1
  Top 0.813: 62.67,89.79 65.21,92.33 IC11.1
N$145
  Top 0.813: R31.1 62.15,100.68 C14.1 62.29,103.44 R32.2
N$147
  Top 0.813: IC11.4 70.55,100.96 68.77,102.74 68.77,111.12 T9.G
N$149
  Top 0.203: R36.1 75.37,89.79
  Top 0.813: 75.37,89.79 77.91,92.33 IC13.1
N$151
  Top 0.203: 78.17,103.51 R38.2
  Top 0.813: R37.1 74.92,100.68 C17.1 75.12,103.51 78.17,103.51
N$153
  Top 0.813: IC13.4 83.25,100.96 81.47,102.74 81.47,111.12 T11.G
N$155
  Top 0.813: R42.1 88.07,89.79 90.61,92.33 IC16.1
N$157
  Top 0.813: R43.1 87.56,100.67 C19.1 87.7,103.44 R44.2
N$159
  Top 0.813: IC16.4 95.95,100.96 94.17,102.74 94.17,111.12 T13.G
N$161
  Top 0.203: R48.1 100.77,89.79
  Top 0.813: 100.77,89.79 103.31,92.33 IC18.1
N$163
  Top 0.813: R49.1 C21.1 103.68,103.3 R50.2
N$165
  Top 0.813: IC18.4 108.65,100.96 106.87,102.74 106.87,111.12 T15.G
N$168
  Top 0.61: R7.1 110.68,44.07 108.14,44.07 IC2.1
N$170
  Top 0.813: R8.1 C3.1 107.42,32.51 R9.2
N$172
  Top 0.813: IC2.4 102.81,34.92 104.58,33.15 104.58,24.77 T2.G
N$174
  Top 0.61: R13.1 97.98,44.07 95.44,44.07 IC4.1
N$176
  Top 0.813: R14.1 98.45,35.26 C5.1 98.39,32.45 R15.2
N$178
  Top 0.203: 90.11,34.92 IC4.4
  Top 0.813: 90.11,34.92 91.88,33.15 91.88,24.77 T4.G
N$180
  Top 0.61: R20.1 85.28,44.07 82.74,44.07 IC7.1
N$182
  Top 0.813: R21.1 C10.1 85.7,32.45 R22.2
N$184
  Top 0.203: 77.41,34.92 IC7.4
  Top 0.813: 77.41,34.92 79.18,33.15 79.18,24.77 T6.G
N$186
  Top 0.61: R26.1 72.58,44.07 70.04,44.07 IC10.1
N$188
  Top 0.813: R27.1 C13.1 69.32,32.51 R28.2
N$190
  Top 0.203: 64.71,34.92 IC10.4
  Top 0.813: 64.71,34.92 66.48,33.15 66.48,24.77 T8.G
N$192
  Top 0.203: 59.88,44.07 R33.1
  Top 0.61: 59.88,44.07 57.34,44.07 IC12.1
N$194
  Top 0.813: R34.1 C15.1 60.3,32.45 R35.2
N$196
  Top 0.813: IC12.4 52.01,34.92 53.78,33.15 53.78,24.77 T10.G
N$198
  Top 0.203: 47.18,44.07 R39.1
  Top 0.61: 47.18,44.07 44.64,44.07 IC14.1
N$200
  Top 0.813: R40.1 C18.1 47.61,32.45 R41.2
N$202
  Top 0.813: IC14.4 39.31,34.92 41.08,33.15 41.08,24.77 T12.G
N$204
  Top 0.61: R45.1 34.48,44.07 31.94,44.07 IC17.1
N$206
  Top 0.813: R46.1 C20.1 31.22,32.51 R47.2
N$208
  Top 0.813: IC17.4 26.61,34.92 28.38,33.15 28.38,24.77 T14.G
N$210
  Top 0.203: 21.78,44.07 R51.1
  Top 0.61: 21.78,44.07 19.24,44.07 IC19.1
N$212
  Top 0.813: R52.1 C22.1 22.14,32.06 R53.2
N$214
  Top 0.813: IC19.4 13.91,34.92 15.68,33.15 15.68,24.77 T16.G
N$217
  Bottom 0.203: R16.2 67.5,79.63 67.5,80.64 67.25,80.64 CAN_LINE_TERM.2
OUT1  (via drill 0.6)
  Top 0.406: v93.98,82.23 93.98,79.37 93.34,78.74 91.87,78.74 IC8.32
  Bottom 0.406: IC18.2 106.36,90.49 100.96,85.09 96.84,85.09 v93.98,82.23
OUT2  (via drill 0.6)
  Top 0.406: v89.85,84.07 89.85,83.5 89.22,82.87 89.22,81.39 IC8.35
  Bottom 0.406: IC16.2 93.66,88.16 v89.85,84.07
OUT3  (via drill 0.6)
  Top 0.406: v88.9,85.09 88.9,84.14 88.44,83.68 IC8.36
  Bottom 0.406: IC13.2 80.96,90.8 82.23,89.54 84.46,89.54 v88.9,85.09
OUT4  (via drill 0.6)
  Top 0.406: v87.63,84.77 87.63,81.38 IC8.37
  Bottom 0.406: IC11.2 68.26,89.54 69.21,88.58 83.82,88.58 v87.63,84.77
OUT5  (via drill 0.6)
  Top 0.406: IC8.42 83.64,83.01 83.82,83.18 v83.82,85.09
  Bottom 0.406: IC9.2 55.56,89.22 57.15,87.63 81.28,87.63 v83.82,85.09
OUT6  (via drill 0.6)
  Top 0.406: v82.87,84.14 82.87,81.39 IC8.43
  Bottom 0.406: IC6.2 42.86,88.9 45.09,86.68 80.33,86.68 v82.87,84.14
OUT7  (via drill 0.6)
  Top 0.406: v72.07,84.14 79.27,84.14 IC8.44
  Bottom 0.406: IC3.2 30.16,86.68 31.12,85.73 70.48,85.73 v72.07,84.14
OUT8  (via drill 0.6)
  Top 0.406: v79.06,81.92 79.06,80.75 IC8.1
  Bottom 0.406: IC1.2 17.46,86.36 19.05,84.77 68.58,84.77 70.8,82.55 78.42,82.55 v79.06,81.92
OUT9  (via drill 0.6)
  Top 0.406: v87.31,75.88 86.99,76.2 86.99,79.1 | IC8.38 86.85,81.21 86.85,79.8 86.99,79.8 86.99,79.1 | 86.99,79.1 86.99,78.9
  Bottom 0.203: 108.14,58.99 108.14,45.59 106.36,45.59 105.6,44.83 IC2.2
  Bottom 0.406: 108.14,58.99 102.04,65.09 92.07,65.09 88.58,68.58 88.58,72.71 89.22,73.34 89.22,74.93 88.26,75.88 v87.31,75.88
OUT10  (via drill 0.6)
  Top 0.406: v86.04,77.47 IC8.39
  Bottom 0.406: IC4.2 92.39,48.26 86.04,54.61 v86.04,77.47
OUT11  (via drill 0.6)
  Top 0.406: v84.14,76.2 84.14,78.11 85.24,79.23 85.24,81.05 IC8.40
  Bottom 0.406: IC7.2 79.69,49.53 84.77,54.61 84.77,75.57 v84.14,76.2
OUT12  (via drill 0.6)
  Top 0.406: v82.87,77.79 82.87,78.11 84.46,79.69 84.46,81.35 IC8.41
  Bottom 0.406: IC10.2 66.99,47.62 70.17,50.8 77.79,50.8 82.87,55.88 v82.87,77.79
OUT13  (via drill 0.6)
  Top 0.406: IC8.5 79.53,76.36 78.14,76.37 77.97,76.2 v77.15,76.2
  Bottom 0.406: IC12.2 54.29,44.45 76.52,66.67 76.52,75.57 v77.15,76.2
OUT14  (via drill 0.6)
  Top 0.406: v77.99,77.43 78.41,77.43 78.69,77.16 80.23,77.15 IC8.4
  Bottom 0.406: IC14.2 41.59,46.04 48.26,52.7 60.96,52.7 75.57,67.31 75.57,76.16 76.84,77.43 v77.99,77.43
OUT15  (via drill 0.6)
  Top 0.406: IC8.3 79.2,77.96 78.74,78.42 v76.52,78.42
  Bottom 0.406: IC17.2 28.89,46.36 33.97,51.43 42.86,51.43 47.31,55.88 62.23,55.88 74.29,67.95 74.29,76.2 v76.52,78.42
OUT16  (via drill 0.6)
  Top 0.406: v74.29,77.79 74.29,78.11 75.57,79.37 78.74,79.37 79.37,78.74 80.22,78.74 IC8.2
  Bottom 0.406: IC19.2 16.19,44.77 24.77,53.34 40.96,53.34 46.04,58.42 63.18,58.42 73.34,68.58 73.34,76.83 v74.29,77.79
OUTPUT1
  Top 0.813: C22.2 21.27,26.12 T16.A1
  Bottom 1.778: CAMDEN_8P-2.P$16 52.49,15.14 49.21,18.42 26.35,18.42 T16.A1
OUTPUT2
  Top 0.813: C20.2 33.97,26.43 T14.A1
  Bottom 1.778: T14.A1 38.1,23.5 40.96,20.64 50.17,20.64 52.39,18.42 61.59,18.42 64.18,15.83 CAMDEN_8P-2.P$15
OUTPUT3
  Top 0.813: C18.2 46.67,26.43 T12.A1
  Bottom 1.778: CAMDEN_8P-2.P$14 68.36,15.14 62.87,20.64 53.66,20.64 50.8,23.5 T12.A1
OUTPUT4
  Top 0.813: C15.2 59.37,26.44 T10.A1
  Bottom 1.778: T10.A1 63.18,23.5 67.95,18.73 77.47,18.73 79.18,17.02 CAMDEN_8P-2.P$13
OUTPUT5
  Top 0.813: C13.2 72.07,26.43 T8.A1
  Bottom 1.778: T8.A1 76.04,23.5 80.53,19 83.4,19 CAMDEN_8P-2.P$12
OUTPUT6
  Top 0.813: C10.2 84.77,26.44 T6.A1
  Bottom 1.778: CAMDEN_8P-2.P$11 93.66,15.62 87.06,22.22 85.28,22.22 T6.A1
OUTPUT7
  Top 0.813: C5.2 97.47,26.45 T4.A1
  Bottom 1.778: T4.A1 97.98,22.22 97.98,20.19 101.68,16.49 CAMDEN_8P-2.P$10
OUTPUT8
  Top 0.813: C3.2 110.17,26.39 T2.A1
  Bottom 1.778: T2.A1 109.92,22.22 109.92,15.84 CAMDEN_8P-2.P$9
OUTPUT9
  Top 0.813: T1.A1 11.11,111.12 C2.2
  Top 1.778: CAMDEN_8P-1.P$9 22.2,120.68 20,123.83 14.92,123.83 13.33,121.29 13.33,117.48 12.38,116.52 T1.A1
OUTPUT10
  Top 0.813: T3.A1 23.81,111.12 23.81,108.42 C4.2
  Bottom 1.778: CAMDEN_8P-1.P$10 60.3,120.68 55.56,125.41 30.16,125.41 25.08,120.33 T3.A1
OUTPUT11
  Top 0.813: T5.A1 36.51,111.12 36.51,108.43 C9.2
  Bottom 1.778: CAMDEN_8P-1.P$11 64.16,120.68 60.96,117.48 39.69,117.48 37.78,115.57 T5.A1
OUTPUT12
  Top 0.813: T7.A1 49.21,111.12 49.21,108.4 C12.2
  Bottom 1.778: T7.A1 50.48,114.3 51.43,115.25 61.59,115.25 63.5,117.16 72.07,117.16 74.9,119.99 CAMDEN_8P-1.P$12
OUTPUT13
  Top 0.813: 62,111.21 61.91,111.12 | 62,111.21 T9.A1 | C14.2 62,108.54 62,111.21
  Bottom 1.422: 73.34,114.93 64.13,114.93 63.18,113.98
  Bottom 1.778: 73.34,114.93 76.2,117.79 79.53,117.79 CAMDEN_8P-1.P$13 | T9.A1 63.18,113.98
OUTPUT14
  Top 0.813: T11.A1 74.61,111.12 74.61,108.69 C17.2
  Bottom 1.778: T11.A1 75.88,114.3 77.15,115.57 85.41,115.57 89.9,120.06 CAMDEN_8P-1.P$14
OUTPUT15
  Top 0.813: C19.2 87.56,111.37 T13.A1
  Bottom 1.778: T13.A1 88.58,115.25 90.17,116.84 95.25,116.84 97.4,118.99 CAMDEN_8P-1.P$15
OUTPUT16
  Top 0.813: T15.A1 100.01,111.12 100.02,111.12 C21.2
  Bottom 1.778: T15.A1 101.28,117.04 CAMDEN_8P-1.P$16
PGC
  Top 0.406: IC8.16 85.24,65.57 89.54,61.28 96.52,61.28 99.38,58.42 99.38,56.71 X2.3
PGD
  Top 0.406: IC8.17 86.04,66.04 89.85,62.23 97.15,62.23 101.92,57.47 101.92,56.71 X2.2
RS232_RX
  Top 0.406: X1.4 73.33,60.95 77.15,64.77 80.96,64.77 83.5,67.31 83.5,69.62 IC8.14
RS232_TX
  Top 0.406: X1.3 75.87,60.63 78.1,62.86 81.6,62.86 84.46,65.72 84.46,69.75 IC8.15